# Altium PCB E22_TTL_RS232(v0.2)-20200615.PcbDoc
Units mil, origin at the board's own origin, x right, y up, seen from the top; angles counter-clockwise.
Board outline 1576 x 2223 mil, 2 copper layers (TopLayer, BottomLayer); 30 components, 23 nets, 110 pads, 426 vias.
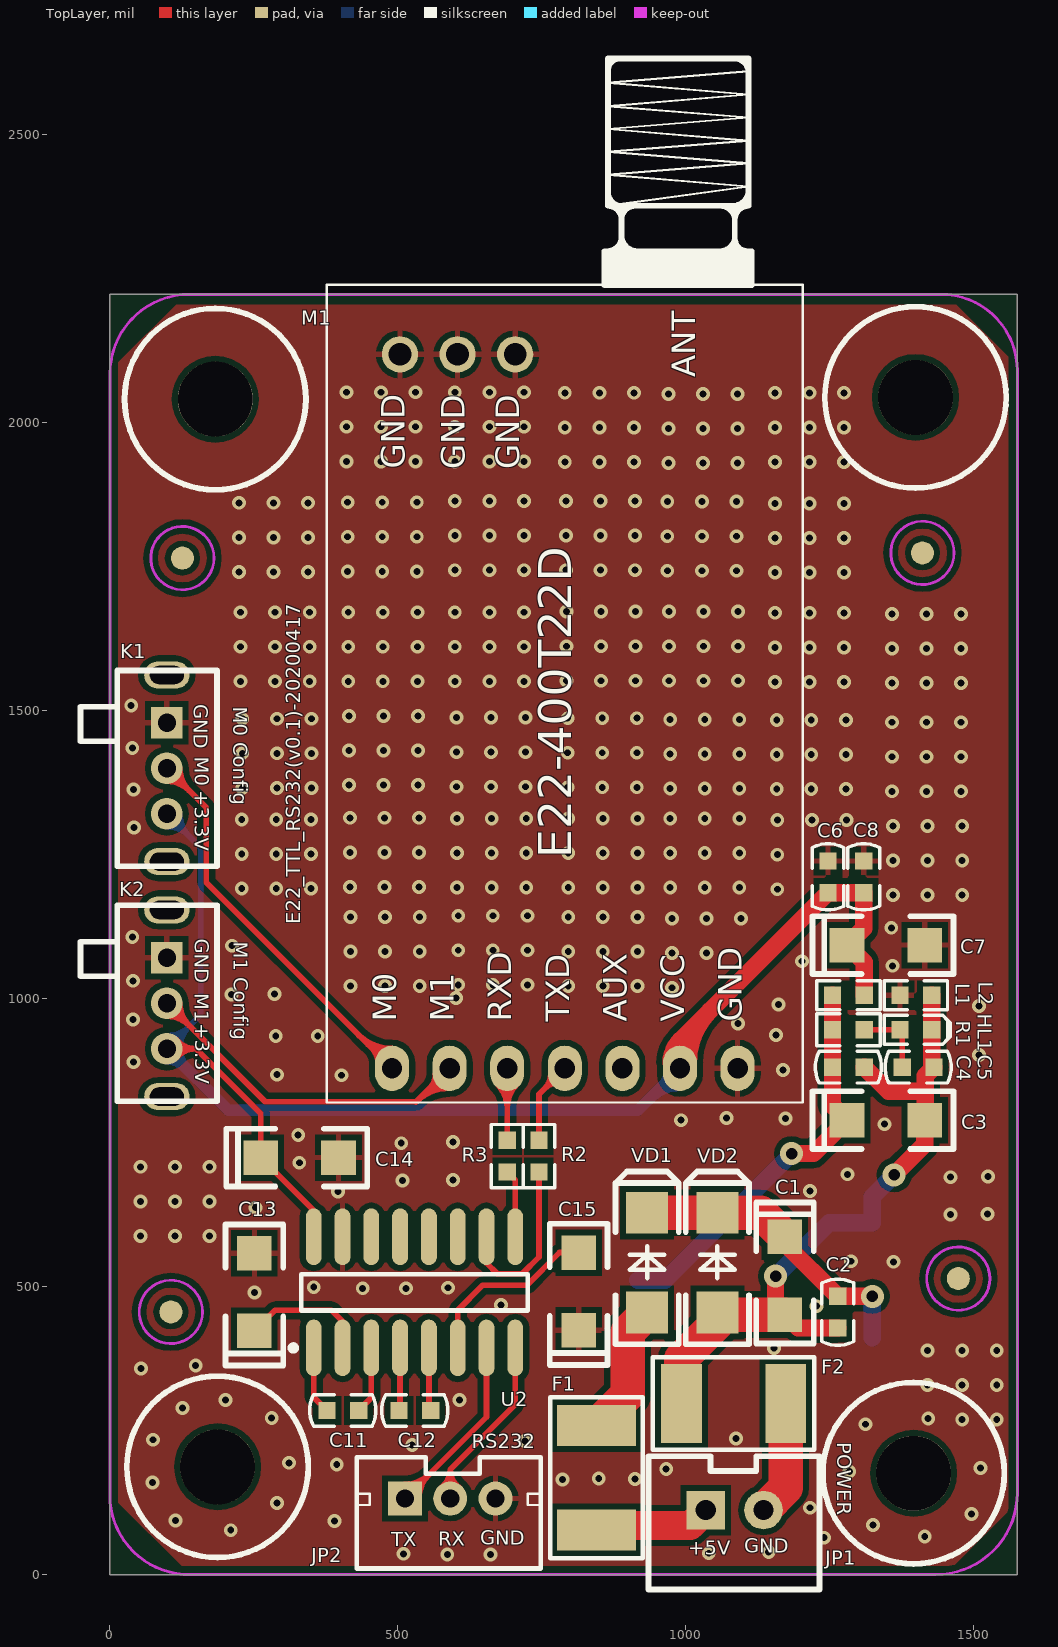
[diagram p0: TopLayer view]
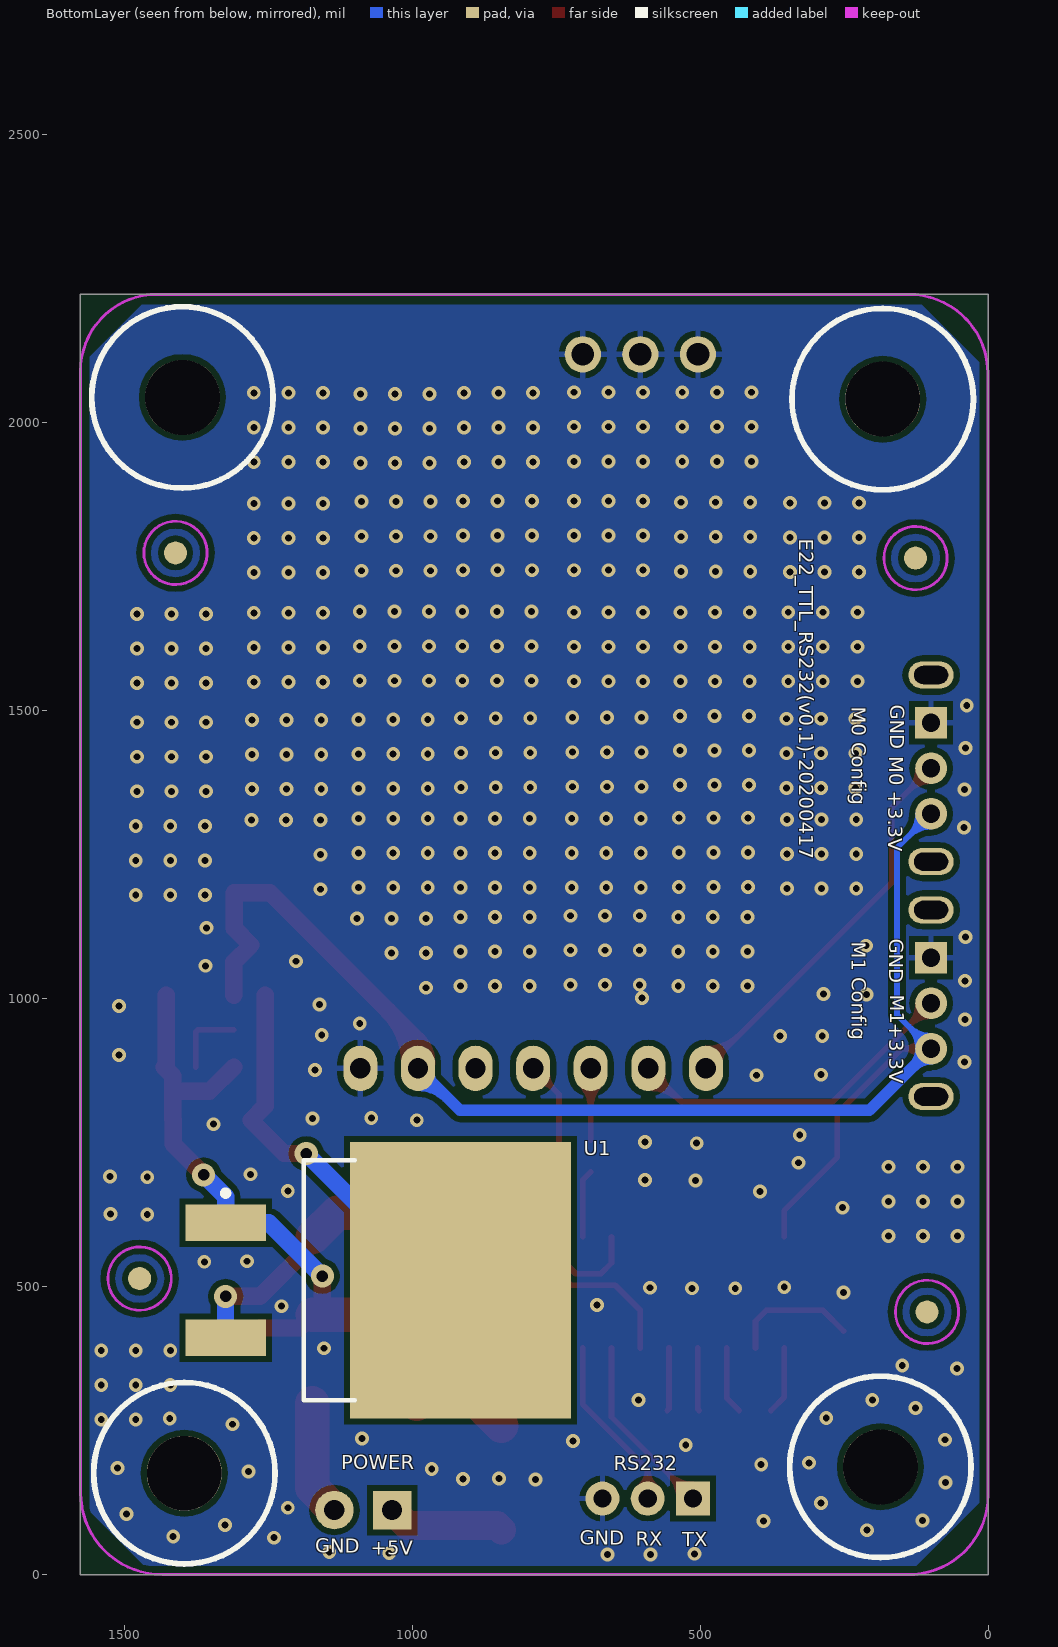
[diagram p1: BottomLayer view, seen from below]

## Layer stack, top to bottom
TopLayer: signal copper 1.4
Dielectric: core 12.6, FR-4, Dk 4.8
BottomLayer: signal copper 1.4

## Board outline
0,0 1575,0 1576,0 1576,2221 1576,2223 0,2223 0,0

## Design rules (kind name [scope] priority, off if disabled: settings)
Clearance Clearance_2 [InNet('RF_IN') vs InNet('GND')] p1: gap=19.68
Clearance [All] p2: gap=10
Clearance Clearance_1 [All] p3: gap=10
ComponentClearance [All] p1 off: gap=10 collisioncheckmode=3 verticalgap=10 showdistances=FALSE
FabricationTestPointUsage TestPointUsage [All] p1: valid=0 allowmultiple=FALSE
FabricationTestpoint Testpoint [(IsPad And (OnTopLayer Or OnBottomLayer))] p1: side=3 testpointundercomponent=TRUE minsize=40 maxsize=100 preferedsize=60 minholesize=20 maxholesize=40 preferedholesize=32 testpointgrid=1 allowsidetop=TRUE allowsidebottom=TRUE usegrid=TRUE gridtolerance=0.01
HoleSize [All] p1: absolutevalues=TRUE maxlimit=200 minlimit=1 maxpercent=80.000 minpercent=20.000
PolygonConnect [IsVia] p1: connectstyle=Direct reliefconductorwidth=10 reliefentries=4 polygonreliefangle="90 Angle"
PolygonConnect PolygonConnect_via [All] p2 off: connectstyle=Relief reliefconductorwidth=10 reliefentries=4 polygonreliefangle="90 Angle"
RoutingVias [All] p1: holewidth=15.75 width=31.5 viastyle="Through Hole" minholewidth=11.81 minwidth=23.62 maxholewidth=19.68 maxwidth=39.37
ShortCircuit [All] p1 off: allowed=FALSE
SilkscreenOverComponentPads [All] p1: minsilkscreentomaskgap=10
SolderMaskExpansion [All] p1: expansion=4
Width [All] p1: maxlimit=100 minlimit=5 preferedwidth=10
22 further rules are at their usual default settings.

## Components (designator, comment, footprint, x,y, rotation, side; value= is the part's Value field where it differs from the comment)
C1 "10uF/25V/5%" C1206-1 1172.23,586.23 r270 top
C2 "100nF/25V/5%" C0603 1264,428 r90 top
C3 "10uF/25V/5%" C1206-1 1280,789 r0 top
C4 "100nF/25V/5%" C0603 1310,881 r180 top
C5 "100nF/25V/5%" C0603 1376,881 r0 top
C6 "100nF/25V/5%" C0603 1247,1239 r270 top
C7 "10uF/25V/5%" C1206-1 1280,1093 r0 top
C8 "100nF/25V/5%" C0603 1309,1239 r270 top
C11 "100nF/25V/5%" C0603 432,285 r180 top
C12 "100nF/25V/5%" C0603 502,285 r0 top
C13 "100nF/25V/5%" C1206-1 251,423 r90 top
C14 "100nF/25V/5%" C1206-1 262,724 r0 top
C15 "100nF/25V/5%" C1206-1 814,424 r90 top
F1 "6V/500mA" F1812 845,168 r90 top
F2 "6V/500mA" F1812 1083,297 r180 top
HL1 "LED蓝灯" LED0603 1372,946 r0 top
JP1 "供电电源" XH2.54-LI-2P 1085,112 r0 top
JP2 "RS232串口" PH2.0-LI-3P 591,132 r0 top locked
K1 "M0选择" SK-12D07 99,1400 r270 top locked
K2 "M1选择" SK-12D07 99,992 r270 top locked
L1 "10uH/5%" L0603 1255,1006 r0 top
L2 "10uH/5%" L0603 1427,1006 r180 top
M1 "E22-400T22D" E22-400T22D 490,879 r90 top locked
R1 "2K/5%" R0603 1255,946 r0 top
R2 "33R/5%" R0603 745,699 r90 top
R3 "33R/5%" R0603 690,699 r90 top
U1 "AMS1117-3.3" D2PAK 1070,511 r180 bottom
U2 "MAX3232CSE" NSO16_M 529,490 r90 top
VD1 "1N5408" SMA_DO-214AC 933,455 r90 top
VD2 "1N4007" SMA_DO-214AC 1055,455 r90 top

## Footprints (in the part's own frame and the unit in brackets; to place one, negate y for a bottom-side part, rotate by r counter-clockwise, add the part's x,y. Pads: shape width x height; smd on the part's side, far side on the other; paste and mask are expansions set on the pad)
C0603 [mil]
  rect 30x30 smd: 1(0,0) 2(55,0)
  silkscreen extent -30,-28 85,28
C1206-1 [mil] "C1206封装钽电容"
  rect 60x60 smd: 1(0,0) 2(135,0)
  silkscreen extent -60,-50 185,50
D2PAK [mm] "D2-PAK, 3-Pads, Body 9.0x10.6mm (max), IPC Medium Density"
  rect 3.55x1.6 smd: 1(-6.45,2.54) 3(-6.45,-2.54)
  rect 9.75x12.2 smd: 2(3.9,0)
  silkscreen extent -6.58,-5.3 -0.75,5.3, body extent -3,-5.28 6,5.28, height 4.56
E22-400T22D [mm]
  oval 2x1.5 hole 0.9: 1(0,0) 2(0,-2.54) 3(0,-5.08) 4(0,-7.62) 5(0,-10.16) 6(0,-12.7) 7(0,-15.24)
  round 1.6 hole 1: 8(31.49,-5.43) 9(31.49,-2.89) 10(31.49,-0.35)
  silkscreen extent -1.51,-18.12 44.54,2.88
F1812 [mm]
  rect 1.8x3.5 smd: 1(-2.3,0) 2(2.3,0)
  silkscreen extent -3.56,-2.03 3.56,2.03
L0603 [mil] "L0603封装电感"
  rect 30x30 smd: 1(0,0) 2(55,0)
  silkscreen extent -28,-25 82,25
LED0603 [mil]
  rect 30x30 smd: A(0,0) K(55,0)
  silkscreen extent -28,-25 87,25
NSO16_M [mm] "SOIC, 16-Leads, Body 9.9x3.9mm, Pitch 1.27mm, IPC Low Density"
  oval 2.5x0.7 smd: 1(-2.45,4.445) 2(-2.45,3.175) 3(-2.45,1.905) 4(-2.45,0.635) 5(-2.45,-0.635) 6(-2.45,-1.905) 7(-2.45,-3.175) 8(-2.45,-4.445) 9(2.45,-4.445) 10(2.45,-3.175) 11(2.45,-1.905) 12(2.45,-0.635) 13(2.45,0.635) 14(2.45,1.905) 15(2.45,3.175) 16(2.45,4.445)
  silkscreen extent -2.57,-5 0.8,5.47, body extent -2,-5 2,5, height 1.75
PH2.0-LI-3P [mm]
  rect 1.5x1.5 hole 0.8: 1(-2,0)
  round 1.5 hole 0.8: 2(0,0) 3(2,0)
  silkscreen extent -4.13,-3.08 4,1.82, body extent -3.95,-3 3.95,1.7, height 6.01
R0603 [mil]
  rect 30x30 smd: 1(0,0) 2(55,0)
  silkscreen extent -28,-28 82,28
SK-12D07 [mm] "3脚2档小型拨动开关"
  oval 1.2x2 hole 0.8 slot 1.5 at 90 deg: 0(-4.115,0) 0(4.115,0)
  rect 1.4x1.4 hole 0.8: 1(-2.007,0)
  round 1.4 hole 0.8: 2(0,0) 3(2.007,0)
  silkscreen extent -4.32,-3.81 4.32,2.21
SMA_DO-214AC [mm]
  rect 1.85x1.85 smd: A(0,0) K(4.4,0)
  silkscreen extent -1.4,-1.4 6.22,1.4
XH2.54-LI-2P [mm]
  rect 1.7x1.7 hole 0.9: 1(-1.27,0)
  round 1.7 hole 0.9: 2(1.27,0)
  silkscreen extent -3.81,-3.51 3.74,2.37, body extent -3.77,-3.3 3.77,2.4, height 7.05

## Part data
C1 C3: library part "Cap Pol1", "钽电容"
C2 C4: library part Cap, "电容"
C5 C6: library part CAP, "电容"
C7 C13 C14 C15: library part ELECTRO1, "钽电容"
C8 C11 C12: library part CAP-SMD, "电容"
F1 F2: library part 保险丝, "自恢复保险丝"
HL1: library part 发光二极管, "发光二极管"
JP1: library part XH2.54-2P/PH2.0-2P, "XH2.54-2P/PH2.0-2P插座"
JP2: library part XH2.54-3P/PH2.0-3P, "PH2.0-3P直插插座"
K1 K2: library part SK-12D07, "SK-12D07：3脚2档小型拨动开关"
L1 L2: library part 电感, "电感"
M1: "E22-400T22D LoRa模块"
R1 R2 R3: library part RES2, "电阻"
U1: library part U_AMS1117, "U_AMS1117稳压芯片"
U2: library part MAX232CSE, "+5V Powered, Multi-Channel RS-232 Driver/Receiver"
VD1 VD2: library part 开关二极管, "开关二极管"

## Free pads (board coordinates)
  round 40 smd far side: 0(106,456) 0(126,1765) 0(1411,1774) 0(1473.31,513.95)
  round 129.92 hole 129.92: 0(183,2041) 0(187.01,187.01) 0(1395.68,176.01) 0(1399,2044)
  round 40 smd: 1(106,456) 1(126,1765) 1(1411,1774) 1(1473.31,513.95)
  round 100 on Bottom Solder: 2(106,456) 2(126,1765) 2(1411,1774) 2(1473.31,513.95)
  round 100 on Top Solder: 3(106,456) 3(126,1765) 3(1411,1774) 3(1473.31,513.95)

## Via types
v1: diameter 24, hole 12, TopLayer to BottomLayer, tented both sides, 422 vias
v2: diameter 40, hole 20, TopLayer to BottomLayer, tented both sides, 4 vias

## Nets (pads, with @x,y where several pads share a name; then routed paths per layer and width w, separated by ;. In a path a pad name is that pad's centre, name@x,y a point inside that pad or via, vN(x,y) a via of type N, cw(c..) or ccw(c..) an arc to the next point about the centre after c; other vN are vias at no path point)
3V3: C6.2 C7.1 C8.2 C14.1 K1.3 K2.3 L1.2 M1.6 U2.16 | length 3284.4
  TopLayer w10: K2.3 149.72,913 ; K2.3@108.33,904.59 cw(c127.23,887.54) 127.23,913 cw(c127.23,938.46) K2.3@108.33,921.41 ; K2.3@115.75,897.89 cw(c149.71,867.28) 149.71,913 ; K2.3@115.75,928.11 ccw(c149.71,958.72) 149.71,913 ; U2.16 354,632 C14.1 262,800.72 149.72,913
  TopLayer w30: M1.6@974.53,888.84 cw(c1029.29,888.84) 990.57,927.57 ; M1.6@979.73,899.11 ccw(c954.93,923.92) 990,923.92 ccw(c1025.07,923.92) M1.6@1000.27,899.11 ; M1.6 990,927 C6.2 C8.2 1309,1122 C7.1 1310,1063 L1.2 ; M1.6@1004.53,888.84 cw(c1131.72,888.84) 1041.78,978.78
  BottomLayer w10: K2.3 158,972 158,1262 K1.3 ; K2.3@99,925.56 ccw(c99,955.88) 120.44,934.44 ccw(c141.88,913) K2.3@111.56,913 ; K2.3@99,935.56 ccw(c99,990.02) 137.51,951.51 ccw(c176.02,913) K2.3@121.56,913 ; K1.3@99,1298.44 cw(c99,1243.98) 137.51,1282.49 cw(c176.02,1321) K1.3@121.56,1321 ; K1.3@99,1308.44 cw(c99,1278.12) 120.44,1299.56 cw(c141.88,1321) K1.3@111.56,1321
  BottomLayer w20: K2.3@99,895.44 cw(c99,853.05) 128.98,883.02 cw(c158.95,913) K2.3@116.56,913 ; K2.3 206,806 917,806 M1.6 ; 939.86,828.86 cw(c990,778.72) M1.6@990,849.63 ; 963.62,852.62 ccw(c947.09,869.16) M1.6@970.47,869.16
3V3A: C3.1 C4.2 L1.1 R1.1 U1.2 | length 706.1
  TopLayer w30: v2(1184,731) 1222,731 C3.1 1255,814 C4.2 R1.1 L1.1
  BottomLayer w30: U1.2 964,511 v2(1184,731)
+5V: C1.1 C2.2 U1.3 VD1.K VD2.K | length 529.9
  TopLayer w30: C1.1 1172.23,574.77 C2.2 v2(1324,483)
  TopLayer w60: VD1.K VD2.K 1130.23,628.23 C1.1
  BottomLayer w30: U1.3 1324,411.06 v2(1324,483)
+5V_IN: F1.1 JP1.1 | length 204.3
  TopLayer w50: F1.1 852.55,85 1008,85 JP1.1
AGND: C1.2 C2.1 C3.2 C4.1 C5.2 F2.2 HL1.K L2.1 U1.1 VD2.A | length 1248.4
  TopLayer w30: v2(1156,518) 1156,467.46 C1.2 1195.46,428 C2.1 ; C4.1 1352,839 1416,839 ; v2(1362,694) 1415,747 C3.2 1416,790 1416,839 ; L2.1 HL1.K 1427,885 C5.2 1416,866 1416,839
  TopLayer w60: F2.2 992.45,374.89 1055,437.44 VD2.A 1058.77,451.23 C1.2
  BottomLayer w30: v2(1156,518) 1249,611 U1.1 1323.94,655.94 v2(1362,694)
DGND: C6.1 C7.2 C8.1 C13.2 C14.2 C15.1 JP2.3 K1.1 K2.1 L2.2 M1.7 M1.8 M1.9 M1.10 U2.15
  other v1: 586,35 661,35 510,36 1040,37 1144,39 1240,64 1415,66 210,77 1325,86 390,93 114,94 1496,105 1216,116 290,124 74,160 786,165 912,166 849,167 1284,179 966,183 1512,185 394,191 311,194 525,225 721,232 75,234 1087,236 1312,261 1480,269 1540,269 1421,271 281,272 126,289 201,303 607,303 1420,329 1480,329 1540,329 54,358 149,363 1420,389 1480,389 1540,389 1153,393 1227,466 679,468 251,490 439,497 514,497 587,498 354,499 1361,543 1287,544 53,588 113,588 173,588 1460,625 1524,626 253,637 53,648 113,648 173,648 396,665 1216,666 508,684 596,685 1460,690 1525,691 1281,695 53,708 113,708 173,708 329,715 506,749 596,751 327,763 1345,782 992,789 1173,792 1071,793 402,867 290,868 1169,876 41,890 1509,902 288,935 361,935 1157,937 1091,957 40,964 1509,987 1161,990 601,1001 211,1007 286,1008 976,1019 418,1022 478,1022 538,1022 796,1022 856,1022 916,1022 605,1024 665,1024 725,1024 40,1031 1359,1057 1202,1065 976,1079 1036,1079 418,1082 478,1082 538,1082 796,1082 856,1082 916,1082 605,1084 665,1084 725,1084 212,1092 39,1107 1357,1123 976,1139 1036,1139 1096,1139 418,1142 478,1142 538,1142 796,1142 856,1142 916,1142 605,1144 665,1144 725,1144 1360,1180 1420,1180 1480,1180 1159,1190 229,1191 289,1191 349,1191 603,1193 663,1193 723,1193 796,1193 856,1193 916,1193 973,1193 1033,1193 1093,1193 417,1194 477,1194 537,1194 1360,1240 1420,1240 1480,1240 1159,1250 229,1251 289,1251 349,1251 603,1253 663,1253 723,1253 796,1253 856,1253 916,1253 973,1253 1033,1253 1093,1253 417,1254 477,1254 537,1254 42,1297 1360,1300 1420,1300 1480,1300 1159,1310 1219,1310 1279,1310 229,1311 289,1311 349,1311 603,1313 663,1313 723,1313 796,1313 856,1313 916,1313 973,1313 1033,1313 1093,1313 417,1314 477,1314 537,1314 1358,1360 1418,1360 1478,1360 41,1363 1158,1364 1218,1364 1278,1364 973,1365 1033,1365 1093,1365 230,1366 290,1366 350,1366 795,1367 855,1367 915,1367 602,1368 662,1368 722,1368 415,1371 475,1371 535,1371 1358,1420 1418,1420 1478,1420 1158,1424 1218,1424 1278,1424 973,1425 1033,1425 1093,1425 230,1426 290,1426 350,1426 795,1427 855,1427 915,1427 602,1428 662,1428 722,1428 415,1431 475,1431 535,1431 39,1435 1358,1480 1418,1480 1478,1480 1158,1484 1218,1484 1278,1484 973,1485 1033,1485 1093,1485 230,1486 290,1486 350,1486 795,1487 855,1487 915,1487 602,1488 662,1488 722,1488 415,1491 475,1491 535,1491 37,1509 1358,1548 1418,1548 1478,1548 1155,1550 1215,1550 1275,1550 227,1551 287,1551 347,1551 414,1551 474,1551 534,1551 599,1551 659,1551 719,1551 793,1552 853,1552 913,1552 971,1552 1031,1552 1091,1552 1358,1608 1418,1608 1478,1608 1155,1610 1215,1610 1275,1610 227,1611 287,1611 347,1611 414,1611 474,1611 534,1611 599,1611 659,1611 719,1611 793,1612 853,1612 913,1612 971,1612 1031,1612 1091,1612 1358,1668 1418,1668 1478,1668 1155,1670 1215,1670 1275,1670 227,1671 287,1671 347,1671 414,1671 474,1671 534,1671 599,1671 659,1671 719,1671 793,1672 853,1672 913,1672 971,1672 1031,1672 1091,1672 1155,1740 1215,1740 1275,1740 224,1741 284,1741 344,1741 413,1742 473,1742 533,1742 968,1743 1028,1743 1088,1743 599,1744 659,1744 719,1744 792,1744 852,1744 912,1744 1155,1800 1215,1800 1275,1800 224,1801 284,1801 344,1801 413,1802 473,1802 533,1802 968,1803 1028,1803 1088,1803 599,1804 659,1804 719,1804 792,1804 852,1804 912,1804 1155,1860 1215,1860 1275,1860 224,1861 284,1861 344,1861 413,1862 473,1862 533,1862 968,1863 1028,1863 1088,1863 599,1864 659,1864 719,1864 792,1864 852,1864 912,1864 970,1930 1030,1930 1090,1930 790,1932 850,1932 910,1932 1155,1932 1215,1932 1275,1932 411,1933 471,1933 531,1933 599,1933 659,1933 719,1933 970,1990 1030,1990 1090,1990 790,1992 850,1992 910,1992 1155,1992 1215,1992 1275,1992 411,1993 471,1993 531,1993 599,1993 659,1993 719,1993 970,2050 1030,2050 1090,2050 790,2052 850,2052 910,2052 1155,2052 1215,2052 1275,2052 411,2053 471,2053 531,2053 599,2053 659,2053 719,2053
GND: F2.1 JP1.2 | length 201
  TopLayer w60: JP1.2 1173.55,150.55 F2.1
M0: K1.2 M1.1 | length 955.4
  TopLayer w10: K1.2@99,1377.44 cw(c99,1322.98) 137.51,1361.49 cw(c176.02,1400) K1.2@121.56,1400 ; K1.2@99,1387.44 cw(c99,1357.12) 120.44,1378.56 cw(c141.88,1400) K1.2@111.56,1400 ; K1.2 167.31,1331.69 167.31,1201.69 M1.1 ; 431.33,937.67 ccw(c490,996.35) M1.1@490,913.37 ; 448.4,920.6 ccw(c490,962.2) M1.1@490,903.37 ; 455.09,913.91 cw(c430.02,888.84) M1.1@465.47,888.84
M1: K2.2 M1.2 | length 858.3
  TopLayer w10: K2.2@99,969.44 cw(c99,914.98) 137.51,953.49 cw(c176.02,992) K2.2@121.56,992 ; K2.2@99,979.44 cw(c99,949.12) 120.44,970.56 cw(c141.88,992) K2.2@111.56,992 ; K2.2 270,821 532,821 M1.2 ; 531.33,820.33 cw(c590,761.65) M1.2@590,844.63 ; 548.4,837.4 cw(c590,795.8) M1.2@590,854.63 ; 555.09,844.09 ccw(c530.02,869.16) M1.2@565.47,869.16
NetC5_1: C5.1 HL1.A R1.2 | length 128.7
  TopLayer w10: R1.2 HL1.A 1376,942 C5.1
NetC11_1: C11.1 U2.3 | length 117.7
  TopLayer w10: C11.1 454,307 U2.3
NetC11_2: C11.2 U2.1 | length 118.1
  TopLayer w10: U2.1 354,308 C11.2
NetC12_1: C12.1 U2.4 | length 109.4
  TopLayer w10: C12.1 504,287 U2.4
NetC12_2: C12.2 U2.5 | length 109.8
  TopLayer w10: U2.5 554,288 C12.2
NetC13_1: C13.1 U2.2 | length 222.2
  TopLayer w10: C13.1 287,459 385,459 404,440 U2.2
NetC15_2: C15.2 U2.6 | length 316.9
  TopLayer w10: U2.6 604,459 647.24,502.24 724.2,502.24 780.96,559 C15.2
NetF1_2: F1.2 VD1.A | length 232.9
  TopLayer w60: F1.2 899.22,312.78 899.22,421.22 VD1.A
NetR2_1: R2.1 U2.10 | length 303.9
  TopLayer w10: U2.10 654,541 672.76,522.24 715.92,522.24 745,551.32 R2.1
NetR3_1: R3.1 U2.9 | length 118.3
  TopLayer w10: R3.1 704,685 U2.9
RS232_RX: JP2.2 U2.8 | length 422.6
  TopLayer w10: JP2.2@575.85,151.29 ccw(c551.37,182.45) 591,182.45 ; JP2.2@582.03,143.42 ccw(c567.53,161.88) 591,161.88 ccw(c614.47,161.88) JP2.2@599.97,143.42 ; JP2.2 591,182.46 ; JP2.2@606.15,151.29 cw(c630.63,182.45) 591,182.45 ; U2.8 704,295.46 591,182.46
RS232_TX: JP2.1 U2.7 | length 468.4
  TopLayer w10: JP2.1 654,273.74 U2.7 ; JP2.1@512.26,146.53 ccw(c512.26,181.6) 537.06,156.8 ccw(c561.86,132) JP2.1@526.79,132 ; JP2.1@512.26,156.53 ccw(c512.26,215.74) 554.13,173.87 ccw(c596,132) JP2.1@536.79,132
TTL_RX: M1.3 R3.2 | length 273.1
  TopLayer w10: M1.3@672.66,851.81 cw(c630.79,809.94) 690,809.94 cw(c749.21,809.94) M1.3@707.34,851.81 ; M1.3@679.73,858.89 cw(c654.93,834.08) 690,834.08 cw(c725.07,834.08) M1.3@700.27,858.89 ; R3.2 M1.3
TTL_TX: M1.4 R2.2 | length 208.3
  TopLayer w10: R2.2 745,834 M1.4 ; 754.37,843.37 cw(c782.73,815.02) M1.4@788.07,854.76 ; 755.09,844.09 ccw(c730.02,869.16) M1.4@765.47,869.16
pads on no net: K1.0 K2.0 M1.5 U2.11 U2.12 U2.13 U2.14

## Polygon pours and split planes (outlines as drawn)
DGND on BottomLayer "BottomLayer-No Net" (solid, pour order 1000): 245,15 1465,15 1560,110 1560,2115 1470,2205 115,2205 15,2105 15,125 125,15 245,15
DGND on TopLayer "BottomLayer-No Net" (solid, pour order 1001): 245,15 1465,15 1560,110 1560,2115 1470,2205 115,2205 15,2105 15,125 125,15 245,15

## Keep-outs
TopLayer:
  circle w5: c106,456 r55
  circle w5: c1473.31,513.95 r55
  circle w5: c1411,1774 r55
  circle w5: c126,1765 r55
BottomLayer:
  circle w5: c106,456 r55
  circle w5: c1473.31,513.95 r55
  circle w5: c1411,1774 r55
  circle w5: c126,1765 r55
KeepOutLayer:
  lines w5: 0,2085.2 0,137.8 ccw(c137.8,137.8) 140.05,0.02 615,0 1433.98,0 ccw(c1433.98,141.83) 1575.82,141.83 1575.82,2090 ; 0.2,2085.2 cw(c138,2085.2) 138,2223 1442.99,2223.01 cw(c1442.99,2090) 1576,2090

## Silkscreen, mask and mechanical layers (free items; w line width, h text height)
TopOverlay:
  circle w10: c187.01,187.01 r157.48
  circle w10: c1395.68,176.01 r157.48
  circle w10: c183,2041 r157.48
  circle w10: c1399,2044 r157.48
  text "GND" at 146,1511 h25 r270
  text "M0 Config" at 214,1507 h25 r270
  text "M0" at 147,1420 h25 r270
  text "+3.3V" at 147,1362 h25 r270
  text "E22_TTL_RS232(v0.1)-20200417" at 331,1129 h25 r90
  text "GND" at 147,1104 h25 r270
  text "M1 Config" at 215,1099 h25 r270
  text "M1" at 147,1009 h25 r270
  text "+3.3V" at 148,957 h25 r270
  text "POWER" at 1263,230 h25 r270
  text "RS232" at 628.04,219.5 h25
  text "GND" at 643,52 h25
  text "RX" at 570,50 h25
  text "TX" at 489,49 h25
  text "GND" at 1102,38 h25
  text "+5V" at 1004,34 h25
BottomOverlay:
  circle w10: c1395.68,176.01 r157.48
  circle w10: c187.01,187.01 r157.48
  circle w10: c183,2041 r157.48
  circle w10: c1399,2044 r157.48
  text "E22_TTL_RS232(v0.1)-20200417" at 328,1799 h25 r90
  text "GND" at 170,1510 h25 r90
  text "M0 Config" at 237,1507 h25 r90
  text "M0" at 172,1421 h25 r90
  text "+3.3V" at 173,1361 h25 r90
  text "GND" at 172,1104 h25 r90
  text "M1 Config" at 237,1099 h25 r90
  text "M1" at 170,1007 h25 r90
  text "+3.3V" at 172,958 h25 r90
  text "POWER" at 1123,183 h25
  text "RS232" at 650,181 h25
  text "GND" at 709,52 h25
  text "RX" at 612,50 h25
  text "TX" at 531,49 h25
  text "GND" at 1168,38 h25
  text "+5V" at 1072,34 h25

## Text inside footprints (layer, text, board x,y; h text height)
M1: TopOverlay "GND" at 1111.26,960.22 h70.87 r90; TopOverlay "VCC" at 1011.26,960.22 h70.87 r90; TopOverlay "AUX" at 911.26,960.22 h70.87 r90; TopOverlay "TXD" at 811.26,960.22 h70.87 r90; TopOverlay "RXD" at 711.26,960.22 h70.87 r90; TopOverlay "M0" at 511.26,960.22 h70.87 r90; TopOverlay "ANT" at 1030,2079 h70.87 r90; TopOverlay "GND" at 526.26,1920.22 h70.87 r90; TopOverlay "GND" at 630,1919 h70.87 r90; TopOverlay "GND" at 725,1919 h70.87 r90